# Altium PCB PCB.PcbDoc (part 1 of 2)
Units mm, origin at the board's own origin, x right, y up, seen from the top; angles counter-clockwise.
Board outline 239.14 x 129.03 mm, 3 copper layers (Top Layer, Mid-Layer 1, Bottom Layer); 117 components, 73 nets, 374 pads, 650 vias.
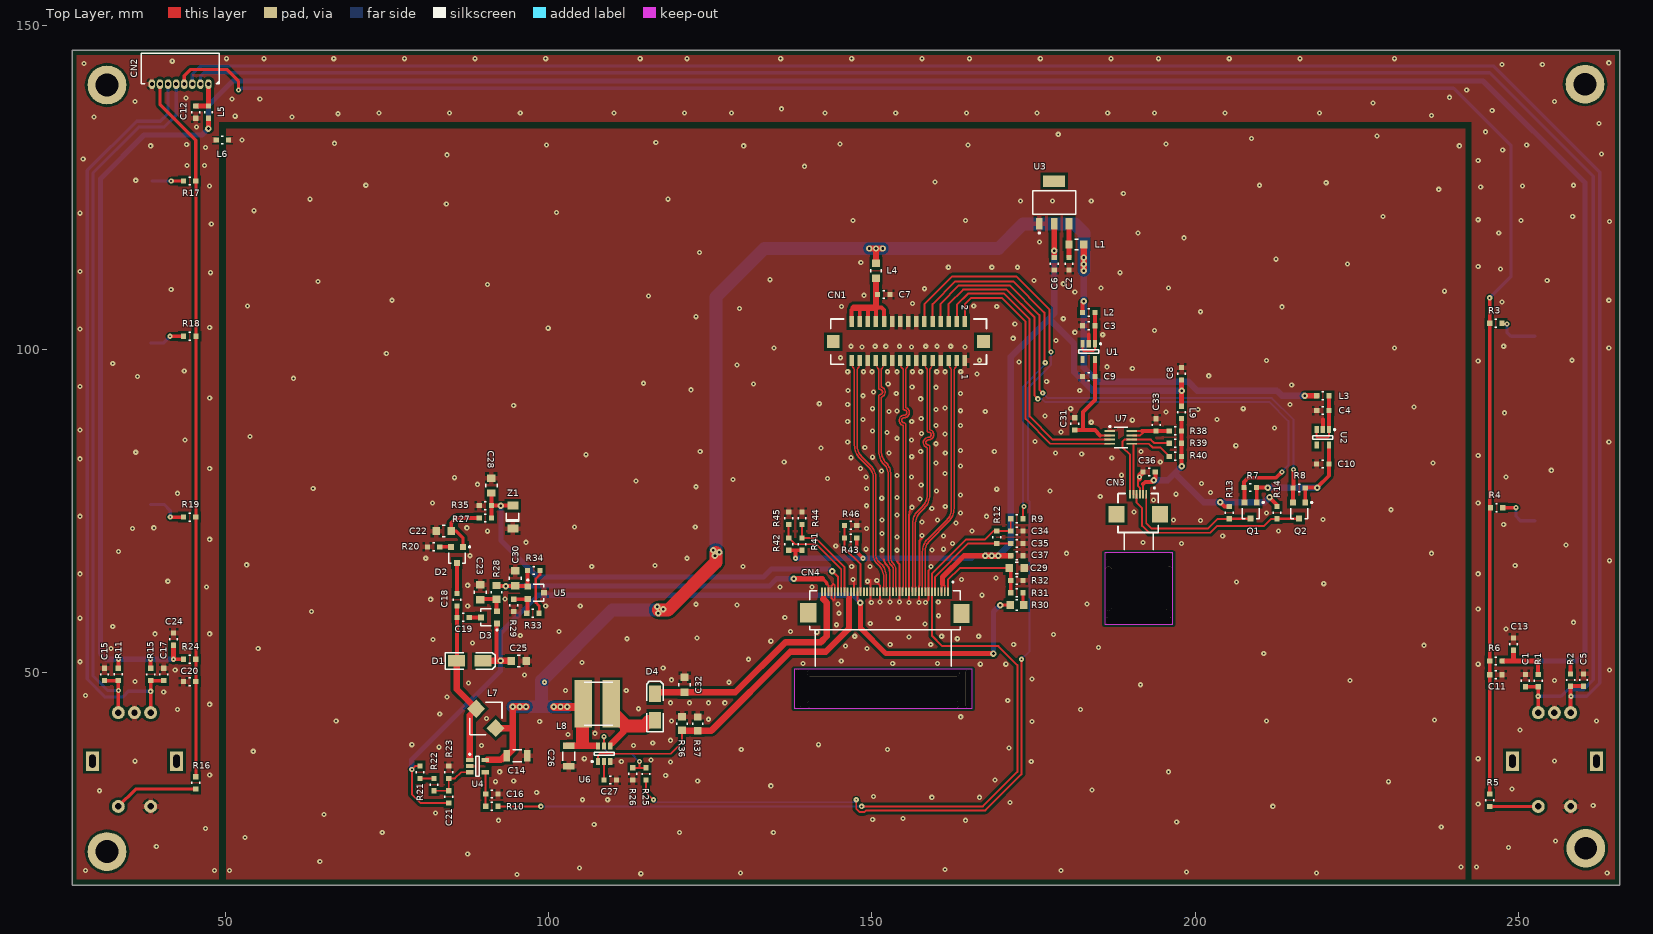
[diagram p0: Top Layer view]
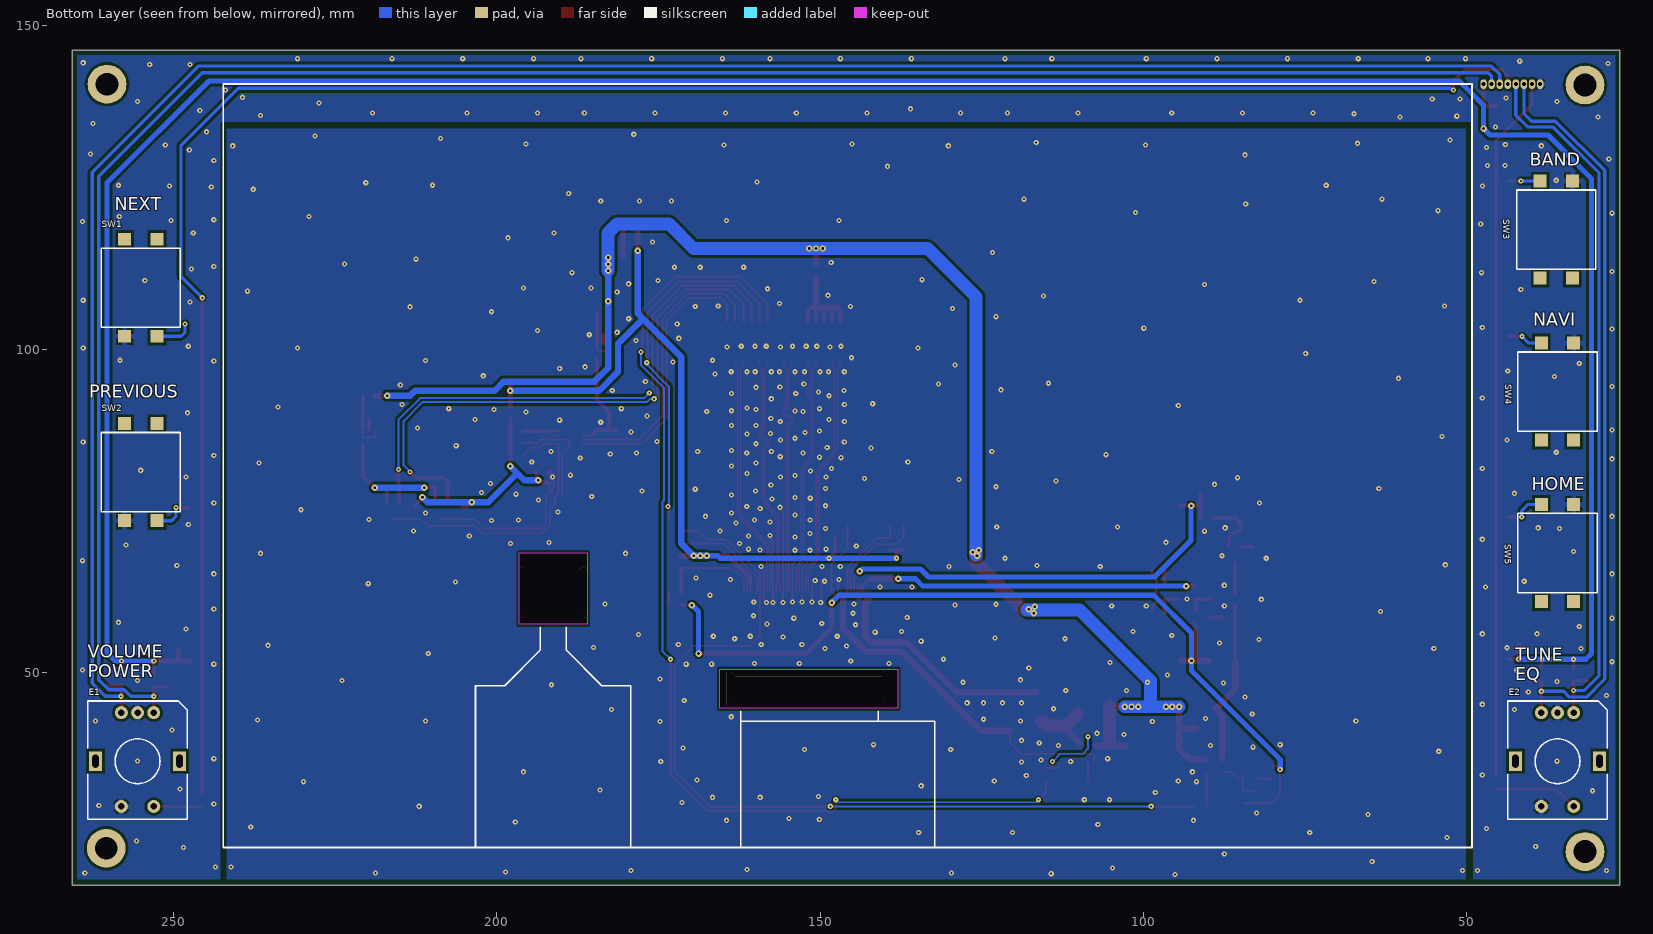
[diagram p1: Bottom Layer view, seen from below]
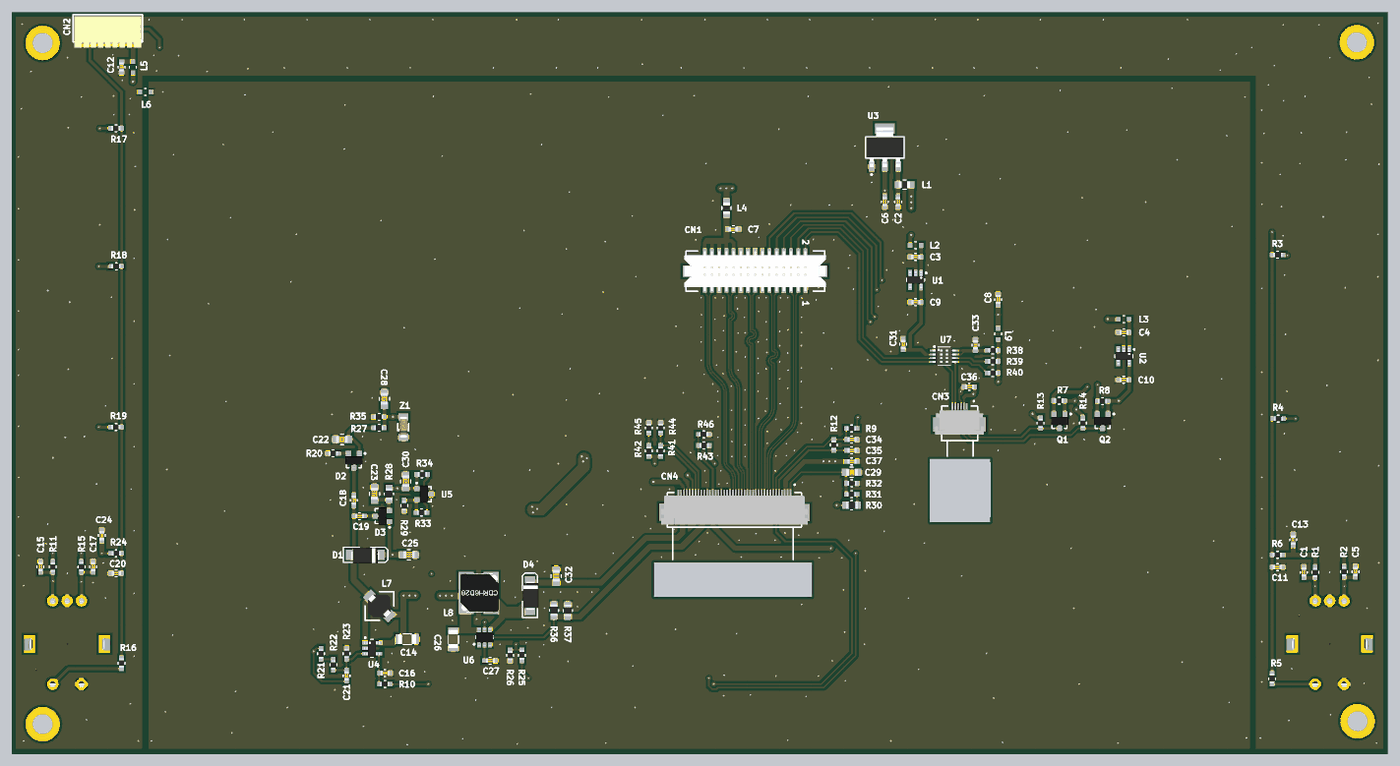
[diagram p3: 3D render of the assembled board from above, using the file's embedded part models]
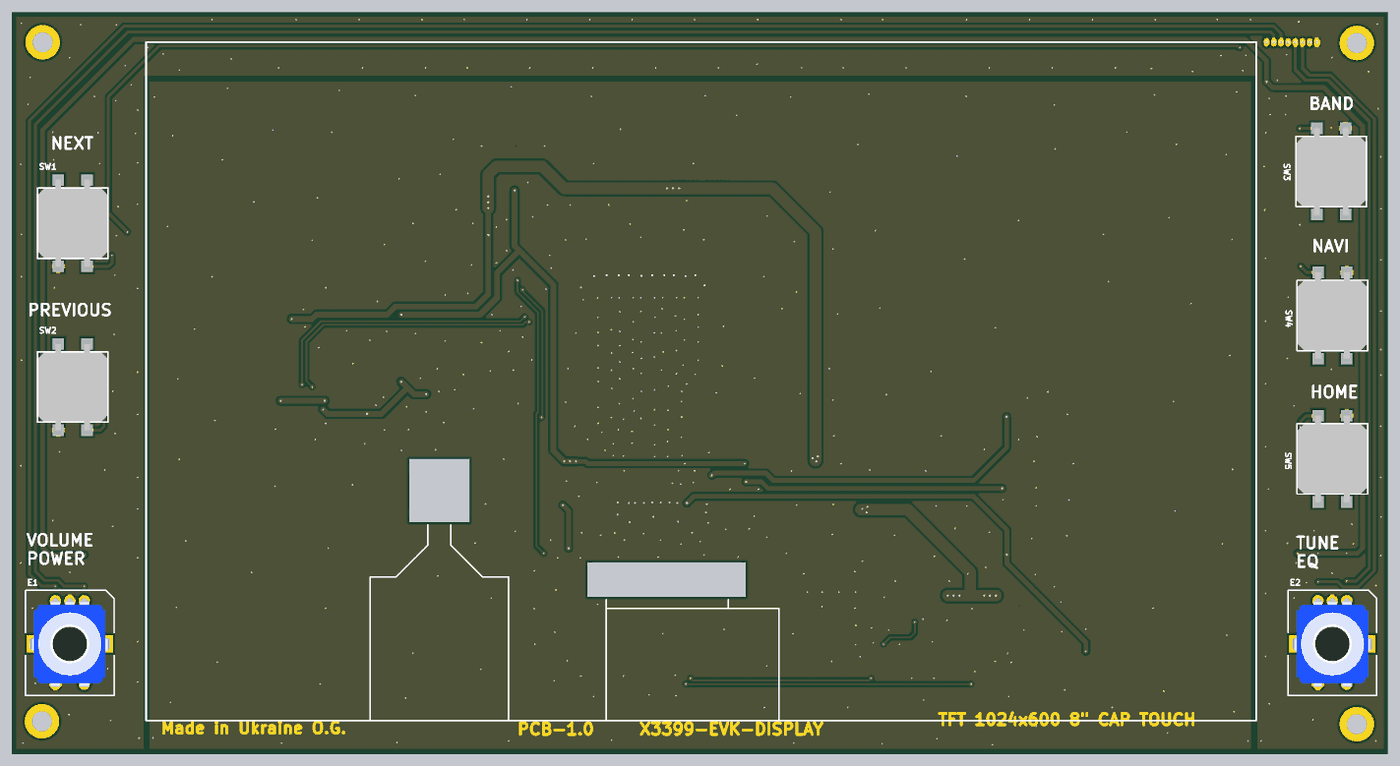
[diagram p4: 3D render of the assembled board from below, using the file's embedded part models]

## Layer stack, top to bottom
Top Solder: solder mask 0.0102, Solder Resist, Dk 3.5
Top Layer: signal copper 0.0356
Dielectric 1: dielectric 0.32, FR-4, Dk 4.8
Mid-Layer 1: signal copper 0.0356
Dielectric2: dielectric 0.32, FR-4, Dk 4.8
Bottom Layer: signal copper 0.0356
Bottom Solder: solder mask 0.0102, Solder Resist, Dk 3.5

## Board outline
26.416,146.177 26.416,17.145 265.557,17.145 265.557,146.177
cut-out: 196.5,68.5 186,68.5 186,57.5 196.5,57.5
cut-out: 165.5,50.5 138,50.5 138,44.5 165.5,44.5

## Design rules (kind name [scope] priority, off if disabled: settings)
Clearance [All] p1: gap=0.2 ignorepadtopadclearanceinfootprint=FALSE except(0.4: Arc-Fill Arc-Poly Arc-Region Track-Fill Track-Poly Track-Region SMDPad-Fill SMDPad-Poly SMDPad-Region THPad-Fill THPad-Poly THPad-Region Fill-Fill Fill-Poly Fill-Region Poly-Poly Poly-Region Region-Region)
DiffPairsRouting [All] p1: maxlimit=0.254 minlimit=0.2 mostfreqgap=0.254 toplayer_maxgap=0.2 toplayer_prefgap=0.2 toplayer_minwidth=0.2 toplayer_maxwidth=0.2 toplayer_prefwidth=0.2 midlayer1_mingap=0.254 midlayer1_minwidth=0.381 midlayer1_maxwidth=0.381 midlayer1_prefwidth=0.381 bottomlayer_maxgap=0.2 bottomlayer_prefgap=0.2 bottomlayer_minwidth=0.2 bottomlayer_maxwidth=0.2 bottomlayer_prefwidth=0.2 maxuncoupledlength=12.7
PlaneConnect [All] p1: pad.planeconnectstyle=Relief pad.reliefexpansion=0.6 pad.reliefentries=4 pad.reliefconductorwidth=0.8 pad.reliefairgap=0.3 via.planeconnectstyle=Direct via.reliefexpansion=0.508 via.reliefentries=4 via.reliefconductorwidth=0.254 via.reliefairgap=0.254
PolygonConnect [All] p1: thpad.connectstyle=Relief thpad.reliefconductorwidth=0.8 thpad.reliefentries=4 thpad.polygonreliefangle="90 Angle" thpad.airgapwidth=0.3 smdpad.connectstyle=Relief smdpad.reliefconductorwidth=0.8 smdpad.reliefentries=4 smdpad.polygonreliefangle="90 Angle" smdpad.airgapwidth=0.3 via.connectstyle=Direct via.reliefconductorwidth=0.254 via.reliefentries=4 via.polygonreliefangle="90 Angle" via.airgapwidth=0.254
RoomDefinition display [InComponentClass('display')] p1 off: confinementstyle=ConfineIn formatcopy=TRUE lockcomponents=FALSE outline 266.499,14.5 424,14.5 424,43.5 266.499,43.5
RoutingVias [All] p1: holewidth=0.3 width=0.8 viastyle="Through Hole" minholewidth=0.3 minwidth=0.8 maxholewidth=0.6 maxwidth=1
SolderMaskExpansion [All] p1: expansion=0.102
Width [All] p1: maxlimit=3 minlimit=0.2 preferedwidth=0.3 midlayer1_minwidth=0.254 midlayer1_maxwidth=0.254 midlayer1_prefwidth=0.254 minimp=50.000000 maximp=50.000000 favimp=50.000000
28 further rules are at their usual default settings.

## Classes and differential pairs
differential pair LVDS_CLK: +LVDS_CLK_P -LVDS_CLK_N
differential pair LVDS_CH3: +LVDS_CH3_P -LVDS_CH3_N
differential pair LVDS_CH2: +LVDS_CH2_P -LVDS_CH2_N
differential pair LVDS_CH1: +LVDS_CH1_P -LVDS_CH1_N
differential pair LVDS_CH0: +LVDS_CH0_P -LVDS_CH0_N

## Components (designator, comment, footprint, x,y, rotation, side; value= is the part's Value field where it differs from the comment)
C1 "CL10B103KB8NNNC" C0603 251,47.818 r90 top value=0.01uF
C2 "CC0603MRX5R5BB106" C0603 180.467,112.268 r90 top value="10uF 6.3V"
C3 "CC0603MRX5R5BB106" C0603 182.56,103.632 r0 top value="10uF 6.3V"
C4 "CC0603MRX5R5BB106" C0603 218.746,90.52 r0 top value="10uF 6.3V"
C5 "CL10B103KB8NNNC" C0603 260,47.913 r90 top value=0.01uF
C6 "CC0603MRX5R5BB106" C0603 178.167,112.268 r90 top value="10uF 6.3V"
C7 "CC0603MRX5R5BB106" C0603 152.781,108.458 r180 top value="10uF 6.3V"
C8 "C1608X7R1H104K080AA" C0603 197.866,95.25 r90 top value=0.1uF
C9 "CC0603MRX5R5BB106" C0603 182.565,95.758 r0 top value="10uF 6.3V"
C10 "CC0603MRX5R5BB106" C0603 218.741,82.265 r0 top value="10uF 6.3V"
C11 "C1608X7R1H104K080AA" C0603 247.396,49.669 r180 top value=0.1uF
C12 "CC0603MRX5R5BB106" C0603 45.466,135.696 r90 top value="10uF 6.3V"
C13 "C1608X7R1H104K080AA" C0603 249.174,55.372 r270 top value=0.1uF
C14 "CL31A107MQHNNNE" C1206 93.553,37.15 r0 top value="100uF 6.3v"
C15 "CL10B103KB8NNNC" C0603 31.369,48.768 r90 top value=0.01uF
C16 "GRM188R71E105KA12D" C0603 90.297,31.242 r0 top value=1uF
C17 "CL10B103KB8NNNC" C0603 40.513,48.768 r90 top value=0.01uF
C18 "GRM188R71E474KA12D" C0603 85.852,60.325 r90 top value="0.47uF 25v"
C19 "GRM188R71E474KA12D" C0603 85.852,58.547 r0 top value="0.47uF 25v"
C20 "C1608X7R1H104K080AA" C0603 43.561,48.614 r0 top value=0.1uF
C21 "CL10C220JB8NNNC" C0603 84.582,31.75 r270 top value=22pF
C22 "GRM188R71E105KA12D" C0805 84.763,71.882 r180 top value="1uF 25v"
C23 "GRM188R71E105KA12D" C0805 89.45,61.468 r90 top value="1uF 25v"
C24 "C1608X7R1H104K080AA" C0603 42.037,56.134 r270 top value=0.1uF
C25 "CL21A226MAQNNNE" C0805 94.46,51.816 r0 top value="22uF 25v"
C26 "CL31A107MQHNNNE" C1206 103.124,38.688 r270 top value="100uF 6.3v"
C27 "CC0603ZRY5V8BB224" C0603 108.585,33.401 r0 top value=0.22uF
C28 "GRM188R71E105KA12D" C0805 91.165,77.978 r90 top value="1uF 25v"
C29 "GRM188R71E105KA12D" C0805 171.45,66.167 r0 top value=1uF
C30 "GRM188R71E105KA12D" C0805 94.869,63.627 r90 top value="1uF 25v"
C31 "C1608X7R1H104K080AA" C0603 181.356,89.408 r270 top value=0.1uF
C32 "CL21A226MAQNNNE" C0805 121.031,47.176 r90 top value="22uF 25v"
C33 "C1608X7R1H104K080AA" C0603 193.929,87.335 r90 top value=0.1uF
C34 "CL10B103KB8NNNC" C0603 171.45,71.882 r0 top value=0.01uF
C35 "C1608X7R1H104K080AA" C0603 171.45,69.977 r0 top value=0.1uF
C36 "CC0603MRX5R5BB106" C0603 191.897,81.026 r0 top value="10uF 6.3V"
C37 "CC0603MRX5R5BB106" C0603 171.45,68.072 r0 top value="10uF 6.3V"
CN1 "LVDS" DF13EA-30DP-1.25V 155.615,101.167 r180 top locked
CN2 "KEYS" 1.25-8AW 43.088,140.97 r180 top locked
CN3 "Touch panel" 6S-0.5SH 191.15,77.55 r0 top locked
CN4 "FH12-40" 40S-0.5SH 152,62.5 r0 top locked value=ZJ080NA-08A
D1 "SS14" SMA 87.827,51.816 r0 top
D2 "BAV99.215" SOT-23-3 85.852,68.199 r180 top value=BAV99
D3 "BAV99.215" SOT-23-3 90.805,58.547 r90 top value=BAV99
D4 "SS24" SMA 116.459,44.704 r90 top value=SS14
E1 "VOLUME/POWER" "Rotary Encoder" 255.5,36.318 r0 bottom locked
E2 "TUNE/EQ" "Rotary Encoder" 36,36.318 r0 bottom locked
L1 "BLM21PG221SN1D" IND0805 180.653,116.205 r0 top value=EMIF
L2 "BLM18AG102SN1D" IND0603 184.465,105.664 r180 top value=EMIF
L3 "BLM18AG102SN1D" IND0603 220.651,92.806 r180 top value=EMIF
L4 "BLM21PG221SN1D" IND0805 150.622,111.184 r90 top value=EMIF
L5 "BLM18AG102SN1D" IND0603 47.438,137.601 r270 top value=EMIF
L6 "BLM18AG102SN1D" IND0603 50.546,132.334 r180 top value=EMIF
L7 "CDRH3D16NP-100NC" CDRH3D16 90.316,42.926 r180 top value=10uH
L8 "CDRH6D28-100NC" CDRH6D28 107.696,45.196 r0 top value=10uH
L9 "BLM18AG102SN1D" IND0603 197.866,91.186 r270 top value=EMIF
Q1 "IRLML2402TRPBF" SOT-23-3 208.534,75.057 r180 top value=IRLML2402
Q2 "IRLML2402TRPBF" SOT-23-3 216.027,75.057 r180 top value=IRLML2402
R1 "10k" R0603 253,49.723 r270 top
R2 "10k" R0603 258,47.913 r90 top
R3 "10k" R0603 245.5,104 r0 top
R4 "4.7k" R0603 245.595,75.5 r0 top
R5 "20k" R0603 245.5,29.318 r90 top
R6 "10k" R0603 247.396,51.816 r180 top
R7 "4.7k" R0603 209.423,78.613 r180 top
R8 "4.7k" R0603 216.977,78.547 r180 top
R9 "100" R0603 173.355,73.787 r180 top
R10 "47k" R0603 92.202,29.337 r180 top
R11 "10k" R0603 33.5,50.673 r270 top
R12 "47k" R0603 169.291,71.882 r270 top
R13 "4.7k" R0603 205.232,75.692 r270 top
R14 "4.7k" R0603 212.598,75.692 r270 top
R15 "10k" R0603 38.5,48.768 r90 top
R16 "20k" R0603 45.466,32.004 r90 top
R17 "15k" R0603 45.466,125.991 r180 top
R18 "10k" R0603 45.5,102 r180 top
R19 "4.7k" R0603 45.466,74.041 r180 top
R20 "100" R0603 81.28,69.449 r0 top
R21 "120k" R0603 80.137,35.56 r270 top value="120k 1%"
R22 "0" R0603 82.296,33.655 r270 top
R23 "15k" R0603 84.582,33.655 r90 top value="15k 1%"
R24 "10k" R0603 43.561,52.07 r0 top
R25 "100" R0603 115.062,33.387 r90 top
R26 "47k" R0603 113.03,35.292 r270 top
R27 "2k" R0603 91.186,73.914 r180 top
R28 "330" R0805 91.948,63.373 r270 top
R29 "11.5k" R0603 94.615,61.341 r270 top value="11.5k 1%"
R30 "16.9k" R0805 171.45,60.452 r0 top value="16.9k 1%"
R31 "2k" R0603 173.355,62.357 r180 top value="2k 1%"
R32 "10k" R0603 171.45,64.262 r0 top value="10k 1%"
R33 "0" R0603 96.647,59.182 r0 top
R34 "80.6k" R0603 96.774,65.786 r0 top value="80.6k 1%"
R35 "470k" R0603 91.186,75.819 r180 top
R36 "0.56" R0805 120.65,41.18 r90 top
R37 "DNI" R0805 123.063,41.148 r90 top
R38 "200k" R0603 195.961,87.376 r0 top
R39 "4.7k" R0603 195.961,85.471 r0 top
R40 "4.7k" R0603 195.961,83.439 r0 top
R41 "0" R0603 139.192,70.828 r270 top
R42 "DNI" R0603 137.13,70.828 r270 top value=NI
R43 "DNI" R0603 145.75,70.828 r0 top value=NI
R44 "DNI" R0603 139.192,74.828 r270 top value=NI
R45 "0" R0603 137.13,74.828 r270 top
R46 "0" R0603 147.655,72.771 r180 top
SW1 "NEXT" 12X12-SMT 255,109.5 r90 bottom value=SW-TACT-4PIN
SW2 "PREV" 12X12-SMT 255,81 r90 bottom value=SW-TACT-4PIN
SW3 "BAND" 12X12-SMT 36.195,118.491 r270 bottom locked value=SW-TACT-4PIN
SW4 "NAVI" 12X12-SMT 36,93.452 r270 bottom locked value=SW-TACT-4PIN
SW5 "HOME" 12X12-SMT 36,68.5 r270 bottom locked value=SW-TACT-4PIN
U1 "TLV75718PDBVR" SOT-23-5 183.515,99.638 r270 top value=TLV733P
U2 "TLV75730PDBVR" SOT-23-5 219.696,86.365 r270 top value=TLV733P
U3 "LM1117" SOT-223 178.167,122.68 r0 top value=LM1117-3.3
U4 "TPS61040" SOT-23-5 89.027,35.56 r0 top
U5 "LM431ACM3" SOT-23-3 98.044,62.357 r270 top
U6 "TPS61165" SOT-23-6 108.585,37.465 r0 top value=TPS61165DRV
U7 "PCA9306DCTR" PSOP-8 188.468,86.36 r0 top
Z1 "BZV55-C6V8" SOD-80C 94.488,74.041 r270 top value=6V8

## Footprints (in the part's own frame and the unit in brackets; to place one, negate y for a bottom-side part, rotate by r counter-clockwise, add the part's x,y. Pads: shape width x height; smd on the part's side, far side on the other; paste and mask are expansions set on the pad)
1.25-8AW [mm] "Connector; 8 Positions; Right Angle"
  oval 1x1.5 hole 0.6: 1(-4.35,0) 2(-3.1,0) 3(-1.85,0) 4(-0.6,0) 5(0.65,0) 6(1.9,0) 7(3.15,0) 8(4.4,0)
  silkscreen extent -6.02,-4.8 6.05,-0.07, body extent -5.83,-4.5 5.83,0.9, height 3.68
6S-0.5SH [mm]
  rect 0.3x1.3 smd: 1(1.25,0) 2(0.75,0) 3(0.25,0) 4(-0.25,0) 5(-0.75,0) 6(-1.25,0)
  rect 2.5x2.5 smd: ""(-3.35,-3.05) ""(3.35,-3.05)
  silkscreen extent -3.12,-5.87 3.12,1.1, body extent -4.25,-4.8 4.25,0.1, height 1.9
12X12-SMT [mm]
  rect 2x2 smd: 1(-7.5,2.5) 2(7.5,2.5) 3(-7.5,-2.5) 4(7.5,-2.5)
  silkscreen extent -6.12,-6.13 6.13,6.12, body extent -7.5,-6 7.5,6, height 4.3
40S-0.5SH [mm]
  rect 0.3x1.3 smd: 1(9.75,0) 2(9.25,0) 3(8.75,0) 4(8.25,0) 5(7.75,0) 6(7.25,0) 7(6.75,0) 8(6.25,0) 9(5.75,0) 10(5.25,0) 11(4.75,0) 12(4.25,0) 13(3.75,0) 14(3.25,0) 15(2.75,0) 16(2.25,0) 17(1.75,0) 18(1.25,0) 19(0.75,0) 20(0.25,0) 21(-0.25,0) 22(-0.75,0) 23(-1.25,0) 24(-1.75,0) 25(-2.25,0) 26(-2.75,0) 27(-3.25,0) 28(-3.75,0) 29(-4.25,0) 30(-4.75,0) 31(-5.25,0) 32(-5.75,0) 33(-6.25,0) 34(-6.75,0) 35(-7.25,0) 36(-7.75,0) 37(-8.25,0) 38(-8.75,0) 39(-9.25,0) 40(-9.75,0)
  rect 2.5x3 smd: ""(-11.85,-3.25) ""(11.85,-3.35)
  silkscreen extent -11.62,-5.87 11.65,1.6, body extent -12.75,-5.4 12.75,0.2, height 2
C0603 [mm]
  rect 0.8x0.8 smd: 1(1.905,0) 2(0,0)
  silkscreen extent 0.8,-0.6 1.1,0.6, body extent 0.2,-0.4 1.8,0.4, height 0.9
C0805 [mm]
  rect 1.14x1.27 smd: 1(2.1,0) 2(-0.2,0)
  silkscreen extent 0.7,-0.9 1.2,0.9, body extent 0,-0.6 2,0.6, height 0.9
C1206 [mm]
  rect 1x1.75 smd: 1(3.175,0) 2(0,0)
  silkscreen extent 0.9,-0.9 2.3,0.9, body extent -0.08,-0.85 3.75,1.25, height 1.77
CDRH3D16 [mm] "Precision Wire Wound Inductor, 2-Leads, Body 3,90x3,90mm, IPC Medium Density"
  rect 2x2 smd rot 135: 1(-1.5,1.5) 2(1.5,-1.5)
  silkscreen extent -2.5,-2.5 2.5,2.5, body extent -2.02,-2.02 2.02,2.02, height 2
CDRH6D28 [mm] "SMD Power Inductor CDRH6D28"
  rect 2.65x7.3 smd: 1(-2.325,0) 2(2,0)
  silkscreen extent -2.2,-3.35 2.2,3.35, body extent -3.35,-3.35 3.35,3.35, height 3
DF13EA-30DP-1.25V [mm] "Double Row Straight Pin Header (SMT)"
  rect 0.7x1.7 smd: 1(-8.75,2.9) 2(-8.75,-3.1) 3(-7.5,2.9) 4(-7.5,-3.1) 5(-6.25,2.9) 6(-6.25,-3.1) 7(-5,2.9) 8(-5,-3.1) 9(-3.75,2.9) 10(-3.75,-3.1) 11(-2.5,2.9) 12(-2.5,-3.1) 13(-1.25,2.9) 14(-1.25,-3.1) 15(0,2.9) 16(0,-3.1) 17(1.25,2.9) 18(1.25,-3.1) 19(2.5,2.9) 20(2.5,-3.1) 21(3.75,2.9) 22(3.75,-3.1) 23(5,2.9) 24(5,-3.1) 25(6.25,2.9) 26(6.25,-3.1) 27(7.5,2.9) 28(7.5,-3.1) 29(8.75,2.9) 30(8.75,-3.1)
  rect 2x2 smd: M1(-11.6,0) M2(11.6,0)
  silkscreen extent -12.1,-3.5 12,3.5, body extent -12.3,-3.45 12.3,3.45, height 4.8
IND0603 [mm]
  rect 0.8x0.8 smd: 1(1.905,0) 2(0,0)
  silkscreen extent 0.8,-0.6 1.1,0.6
IND0805 [mm]
  rect 1.14x1.2 smd: 1(2.1,0) 2(-0.2,0)
  silkscreen extent 0.7,-0.8 1.2,0.8, body extent -0.1,-0.6 1.9,0.6, height 0.95
PSOP-8 [mm] "PSOP, 8-Leads, Body 2,95x2,80mm, Pitch 0,65mm, IPC Medium Density"
  rect 1.6x0.3 smd: 1(-1.7,0.975) 2(-1.7,0.325) 3(-1.7,-0.325) 4(-1.7,-0.975) 5(1.7,-0.975) 6(1.7,-0.325) 7(1.7,0.325) 8(1.7,0.975)
  silkscreen extent -1.82,-1.6 1.05,1.8, body extent -2,-1.6 2,1.6, height 1.4
R0603 [mm]
  rect 0.8x0.8 smd: 1(1.905,0) 2(0,0)
  silkscreen extent 0.8,-0.6 1.1,0.6, body extent 0.2,-0.4 1.8,0.4, height 0.5
R0805 [mm]
  rect 1.14x1.2 smd: 1(2,0) 2(-0.1,0)
  silkscreen extent 0.79,-0.8 1.1,0.8, body extent 0,-0.6 2,0.6, height 0.5
"Rotary Encoder" [mm] "Rotary Encoder - SW"
  round 2 hole 1: 1(-2.5,-7.5) 2(0,-7.5) 3(2.5,-7.5) 4(2.5,7) 5(-2.5,7)
  rect 2x3 hole 1 slot 2 at 90 deg: MP1(-6.5,0) MP2(6.5,0)
  silkscreen extent -7.7,-9.3 7.7,9, body extent -7.5,-7.5 7.5,7.5, height 16.2
SMA [mm]
  rect 2.6x1.8 smd: 1(-2.05,0) 2(2.05,0)
  silkscreen extent -3.8,-1.3 3.95,1.3, body extent -2.5,-1.48 2.5,1.22, height 2.15
SOD-80C [mm]
  rect 1.25x1.7 smd: 1(-1.775,0) 2(1.775,0)
  silkscreen extent -0.6,-1 0.6,0.9, body extent -1.82,-0.8 1.88,0.8, height 1.6
SOT-23-3 [mm]
  rect 0.9x0.95 smd: 1(-0.95,-1.25) 2(0.95,-1.25) 3(0,1.25)
  silkscreen extent -2.07,-1.37 1.3,1.25, body extent -1.52,-1.29 1.48,1.25, height 1.1
SOT-23-5 [mm] "SOT23, 5-Leads, Body 2.9x1.6mm, Pitch 0.95mm, Lead Span 2.8mm, IPC Medium Density"
  rect 1.1x0.65 smd: 1(-1.2,0.95) 2(-1.2,0) 3(-1.2,-0.95) 4(1.2,-0.95) 5(1.2,0.95)
  silkscreen extent -1.32,-1.55 0.25,1.95, body extent -1.44,-1.5 1.4,1.5, height 1.1
SOT-23-6 [mm] "SOT23, 6-Leads, Body 2.9x1.6mm, Pitch 0.95mm, Lead Span 2.8mm, IPC Medium Density"
  rect 0.65x1.1 smd: 1(-0.95,-1.2) 2(0,-1.2) 3(0.95,-1.2) 4(0.95,1.2) 5(0,1.2) 6(-0.95,1.2)
  silkscreen extent -1.95,-1.32 1.55,0.25, body extent -1.55,-1.53 1.55,1.53, height 1.45
SOT-223 [mm]
  rect 1.05x1.75 smd: 1(-2.3,-3.3) 2(0,-3.3) 3(2.3,-3.3)
  rect 3.4x1.75 smd: 4(0,3.3)
  silkscreen extent -3.35,-4.85 3.35,1.85, body extent -3.25,-3.43 3.25,3.46, height 1.6

## Part data
C1 C2 C3 C4 C5 C6 C7 C8 C9 C10 C11 C12 C13 C14 C15 C16 C17 C18 C19 C20 C21 C22 C23 C24 C25 C26 C27 C28 C29 C30 C31 C32 C33 C34 C35 C36 C37: library part CAP_NPOL, "CAP_NPOL"
CN1: library part "HDR 15X2", "Header, 15-Pin, Dual row", LatestRevisionDate=17-Jul-2002, LatestRevisionNote="Re-released for DXP Platform.", Publisher="Altium Limited"
CN2: library part "HDR 8", "Header, 8-Pin", LatestRevisionDate=17-Jul-2002, LatestRevisionNote="Re-released for DXP Platform.", Publisher="Altium Limited"
CN3: library part "Header 6", "Header, 6-Pin", LatestRevisionDate=17-Jul-2002, LatestRevisionNote="Re-released for DXP Platform.", Publisher="Altium Limited"
CN4: "DT38"
D1 D4: library part SHOTTKY, "SHOTTKY"
D2 D3: library part DIODE_DUAL_1, "Dual series 1"
E1 E2: library part ENC_SW, "ENC_SW"
L1 L2 L3 L4 L5 L6 L9: library part IND_WO_IRON, "IND_WO_IRON"
L7 L8: library part IND_W_IRON, "IND_W_IRON"
Q1 Q2: library part N-Channel, "HEXFET Power MOSFET"
R1 R2 R3 R4 R5 R6 R7 R8 R10 R11 R12 R13 R14 R15 R16 R17 R18 R19 R20 R21 R22 R23 R24 R26 R27 R28 R29 R30 R31 R32 R33 R34 R35 R36 R37 R38 R39 R40 R41 R42 R43 R44 R45 R46: library part RESISTOR, "RES"
R9 R25: library part RESISTOR
SW1 SW2 SW3 SW4 SW5: library part SW-TACT-4PIN
U1 U2: library part TLV733P, "Capacitor-Free, 300-mA, Low-Dropout Regulator with Foldback Current Limit for Portable Devices"
U4: library part TPS6104x
U5: "Adjustable Precision Zener Shunt Regulator, 3-pin SOT-23", Manufacturer="National Semiconductor", PackageTopMarking=N1F*XTT, PowerWise=N, Supplier Part Number 1=1215209, ComponentLink1Description="LM431 Datasheet", ComponentLink1URL=http://www.national.com/ds/LM/LM431.pdf, ComponentLink2Description="LM431 Web Page", ComponentLink2URL=http://www.national.com/pf/LM/LM431.html, ComponentLink3Description="MF03A Package Page", ComponentLink3URL=http://www.national.com/packaging/folders/mf03a.html, CompType=MiscPower, DatasheetVersion=Mar-2005, PackageDescription="Molded SOT-23, .115 x .051 x .037in Body, 3 Lead, .075 in Pitch", PackageReference=MF03A, PackageVersion="revB, Mar-2003", PartNumber=LM431ACM3, PinCount=3, Published=4-Dec-2008, Publisher="Altium Limited", RoHS=N, Supplier 1=Farnell
U6: library part TPS61165DRV, "TPS61165DRV (WSON6 package)"
U7: library part PCA9306, "PCA9306 Dual Bidirectional I2C Bus and SMBus Voltage-Level Translator"
Z1: library part ZENNER, "ZENNER"

## Free pads (board coordinates)
  round 6 hole 3.5: MH(31.75,22.352) MH(31.75,140.843) MH(260.223,140.97)
  round 6 hole 3.5 mask+0.102: MH(260.35,22.86)
  oval 1x6 hole 1 slot 6 at 90 deg unplated: ""(138.5,47.5) ""(164.973,47.5)
  oval 23.5x1 hole 1 slot 23.5 at 0 deg unplated: ""(151.743,45.085) ""(151.75,49.911)
  oval 1x6.8 hole 1 slot 6.8 at 90 deg unplated: ""(186.563,62.992) ""(195.961,62.992)
  oval 10.5x1 hole 1 slot 10.5 at 0 deg unplated: ""(191.25,58.039) ""(191.252,67.945)

## Via types
v1: diameter 0.8, hole 0.3, Top Layer to Bottom Layer, tented both sides, 610 vias
v2: diameter 1, hole 0.4, Top Layer to Bottom Layer, tented both sides, 40 vias

## Nets (pads, with @x,y where several pads share a name; then routed paths per layer and width w, separated by ;. In a path a pad name is that pad's centre, name@x,y a point inside that pad or via, vN(x,y) a via of type N, cw(c..) or ccw(c..) an arc to the next point about the centre after c; other vN are vias at no path point)
1V8: C9.1 C31.1 U1.5 U7.2 | length 17.4
  Top Layer w0.3: 185.274,86.685 U7.2@186.768,86.685
  Top Layer w0.6: C31.1@181.356,87.503 182.626,87.503 ; U1.5@184.465,98.438 184.465,92.136 182.626,90.297 182.626,87.503 ; 185.274,86.685 184.456,87.503 182.626,87.503
3V0: C10.1 Q1.1 Q2.1 R7.2 R8.2 U2.5 | length 23.1
  Top Layer w0.3: R7.2@209.423,78.613 R7.2@209.484,78.552 ; R8.2@216.977,78.547 R8.2@217.043,78.613
  Top Layer w0.6: R7.2@209.423,78.613 v2(211.201,78.613) ; Q1.1@209.484,76.307 R7.2@209.484,78.552 ; Q2.1@216.977,76.307 R8.2@216.977,78.547 ; R8.2@217.043,78.613 v2(218.821,78.613) 220.646,80.438 C10.1@220.646,82.265 U2.5@220.646,85.165
  Bottom Layer w1: v2(211.201,78.613) v2(218.821,78.613)
3V3: C6.1 C8.2 C37.2 CN4.2 CN4.3 L9.2 R41.1 R42.1 R43.1 U3.2 | length 141.6
  Top Layer w0.3: v1@138.161,67.96 v1(138.176,67.691) ; CN4.3@160.75,62.5 160.75,63.595 160.909,63.754 161.25,63.413 CN4.2@161.25,62.5
  Top Layer w0.6: R42.1@137.13,68.923 138.161,68.923 ; v1@138.161,67.96 138.161,68.923 ; R41.1@139.192,68.923 138.161,68.923 ; R43.1@147.655,70.828 147.655,68.626 v1(148.59,67.691)
  Top Layer w0.8: 160.909,63.754 160.909,64.77 164.211,68.072 v2(167.513,68.072) ; v2(169.545,68.072) C37.2@171.45,68.072 ; C6.1@178.167,114.173 U3.2@178.167,119.38 ; L9.2@197.866,91.186 v2(197.866,93.599) C8.2@197.866,95.25
  Top Layer w1: v2(167.513,68.072) v2(168.529,68.072) v2(169.545,68.072)
  Bottom Layer w0.8: v1(138.176,67.691) v1(148.59,67.691) 165.481,67.691 165.862,68.072 v2(167.513,68.072)
  Bottom Layer w1: v2(167.513,68.072) v2(168.529,68.072) v2(169.545,68.072) 171.45,69.977 171.45,98.806 177.356,104.712 ; v2(178.181,115.189) 178.181,105.537 177.356,104.712 ; v2(197.866,93.599) 184.15,93.599 181.229,96.52 181.229,100.838 177.356,104.712
5V0: C14.2 C26.2 L1.1 L2.1 L3.1 L4.1 L7.1 L8.1 U4.5 U6.6 | length 251
  Top Layer w0.3: 94.469,41.426 94.488,41.407 ; L8.1@105.131,44.704 L8.1@105.258,44.831 ; U6.6@107.315,38.665 U6.6@107.635,38.665 ; v2@182.56,107.249 v2(182.753,107.442) ; v2(216.916,92.837) v2@216.947,92.806
  Top Layer w0.6: L2.1@182.56,105.664 v2@182.56,107.249
  Top Layer w0.8: v2@216.947,92.806 L3.1@218.746,92.806
  Top Layer w1: U4.5@90.551,36.51 92.644,36.51 C14.2@93.345,37.211 ; L7.1@91.816,41.426 94.469,41.426 ; C14.2@93.553,37.15 94.488,38.085 94.488,41.407 v2(94.488,44.729) ; C26.2@102.87,38.688 C26.2@103.124,38.688 107.292,38.688 U6.6@107.315,38.665 ; v2@149.579,115.57 v2(150.622,115.57) ; L4.1@150.622,113.284 v2(150.622,115.57) ; v2(151.638,115.57) v2(150.622,115.57) ; v2(182.753,112.141) v2(182.753,113.157) v2(182.753,114.173) L1.1@182.753,116.205
  Top Layer w1.2: v2(94.488,44.729) v2(95.524,44.729) v2(96.52,44.729) ; v2(100.838,44.704) v2(101.854,44.704) v2(102.87,44.704) L8.1@105.131,44.704
  Top Layer w2: 105.258,39.243 L8.1@105.258,44.831 ; v2@116.967,59.69 118.491,59.69 125.857,67.056 125.857,68.58
  Bottom Layer w0.3: v2@100.813,44.729 v2(100.838,44.704)
  Bottom Layer w1: v2(182.753,112.141) v2(182.753,107.442) 182.753,97.155 184.912,94.996 198.882,94.996 200.279,93.599 212.598,93.599 213.36,92.837 v2(216.916,92.837)
  Bottom Layer w2: v2(94.488,44.729) v2(95.524,44.729) v2(96.52,44.729) 98.933,44.729 ; v2@102.845,44.729 100.813,44.729 98.933,44.729 ; v2@117.983,59.69 109.855,59.69 98.933,48.768 98.933,44.729 ; v2@125.857,68.199 125.857,68.923 125.857,108.077 133.35,115.57 v2(149.606,115.57) v2(151.638,115.57) 169.545,115.57 173.355,119.38 181.356,119.38 182.753,117.983 v2(182.753,114.173) v2(182.753,113.157) v2(182.753,112.141)
  other v1: 99.371,48.514
  other v2: 116.967,59.182 117.729,59.817 116.84,60.16 125.73,68.072 126.365,68.626 125.476,68.923
AGND: C1.1 C5.1 C11.2 C12.2 C13.2 C15.1 C17.1 C20.2 C24.2 CN2.8 E1.2 E1.4 E2.2 E2.4 L6.1 SW1.1 SW2.1 SW3.1 SW4.1 SW5.1
  other v1: 263.652,19.05 28.448,19.431 48.387,19.431 243.459,19.939 248.412,22.987 39.37,23.114 255.651,24.003 46.99,25.908 261.493,29.464 243.713,29.718 30.607,31.75 248.92,32.004 47.625,34.163 36.068,36.318 255.524,36.322 243.713,36.703 250.19,41.148 262.001,42.545 42.672,44.323 47.625,45.106 28.448,46.482 40.513,46.99 36.068,48.614 255.5,48.768 42.291,50.419 264.033,50.419 243.713,51.308 27.559,51.689 32.385,53.721 43.815,53.848 39.176,56.007 47.625,56.007 248.031,56.769 32.639,57.15 258.445,57.785 27.559,58.42 243.713,59.817 47.117,63.246 41.148,64.135 27.559,65.278 243.713,65.278 249.428,66.567 264.033,67.31 33.528,68.707 257.302,69.723 47.625,70.612 35.687,72.263 38.989,72.39 247.65,72.898 27.559,74.168 243.713,76.219 42.672,77.724 248.031,80.264 255.016,81.28 47.625,81.551 27.559,83.058 243.713,83.566 36.195,84.074 263.906,85.652 43.815,85.976 27.559,87.503 247.777,90.17 47.625,92.456 27.559,94.234 36.449,95.758 43.688,96.647 32.639,97.79 243.713,98.171 258.191,98.298 263.906,100.203 247.65,100.457 27.559,103.124 47.625,103.378 247.396,107.315 263.906,107.569 41.676,109.22 254.381,110.617 47.752,111.828 27.559,112.014 247.142,112.395 243.713,112.776 246.888,117.983 47.879,119.38 264.033,119.761 250.317,119.888 243.713,120.015 258.318,120.523 27.559,121.031 244.094,125.095 47.606,125.222 250.571,125.222 258.445,125.349 36.195,126.111 44.142,128.397 46.813,128.397 243.713,129.159 28.067,129.413 262.763,130.175 247.5,130.81 46.99,131.191 38.5,131.445 251.206,131.572 44.069,131.634 244.856,133.604 45.593,134.366 262.382,134.874 29.718,135.89 60.325,135.89 51.562,136.017 236.474,136.144 67.437,136.398 73.787,136.525 84.709,136.525 95.631,136.525 110.109,136.525 121.031,136.525 128.27,136.525 142.748,136.525 153.67,136.525 164.592,136.525 175.514,136.525 186.436,136.525 193.675,136.525 204.597,136.525 219.202,136.525 245.872,136.906 136.017,137.16 227.457,138.049 36.068,138.303 255.524,138.303 51.054,138.684 55.372,138.684 43.942,138.811 239.268,138.938 241.935,140.081 247.396,144.023 253.619,144.018 28.194,144.145 263.906,144.272 41.839,144.526 50.23,144.907 56.007,144.907 66.802,144.907 77.724,144.907 88.646,144.907 99.568,144.907 114.173,144.907 121.412,144.907 135.89,144.907 146.865,144.907 157.734,144.907 165.1,144.907 176.022,144.907 186.944,144.907 194.31,144.907 205.232,144.907 216.154,144.907 230.759,144.907
AVDD: C13.1 C24.1 L5.1 R1.2 R2.1 R6.2 R11.2 R15.1 R24.2 | length 429.3
  Top Layer w0.3: R11.2@33.5,50.673 R11.2@33.528,50.701 ; R15.1@38.481,50.692 R15.1@38.5,50.673 ; R1.2@252.984,49.739 R1.2@253,49.723
  Top Layer w0.5: v1(42.037,52.07) R24.2@43.561,52.07
  Top Layer w0.6: R11.2@33.528,50.701 v1(33.528,52.07) ; R15.1@38.481,50.692 v1(38.481,52.07) ; R1.2@252.984,49.739 v1(252.984,51.816) ; R2.1@258,49.818 v1(258,51.816)
  Top Layer w0.8: v1(42.037,52.07) C24.1@42.037,54.229 ; v2(47.438,134.112) L5.1@47.438,135.696 ; R6.2@247.396,51.816 249.174,51.816 ; C13.1@249.174,53.467 249.174,51.816 ; v1(252.984,51.816) 249.174,51.816
  Bottom Layer w0.8: v1(42.037,52.07) v1(38.481,52.07) v1(33.528,52.07) 31.623,52.07 30.734,52.959 30.734,126.365 37.465,133.096 46.422,133.096 v2(47.438,134.112) 47.438,137.735 47.498,137.795 51.181,141.478 244.475,141.478 260.223,125.73 260.223,56.007 260.223,53.086 258.953,51.816 v1(258,51.816) v1(252.984,51.816)
ENC_TUNE_A: C15.2 CN2.5 E2.1 R11.1 | length 111
  Top Layer w0.5: C15.2@31.369,48.768 R11.1@33.5,48.768 E2.1@33.5,43.818
  Bottom Layer w0.5: v1(33.528,47.244) 31.877,47.244 29.591,49.53 29.591,127.254 36.703,134.366 40.64,134.366 42.438,136.164 CN2.5@42.438,140.97
ENC_TUNE_B: C17.2 CN2.6 E2.3 R15.2 | length 117.6
  Top Layer w0.5: E2.3@38.5,43.818 v1(38.5,47.117) R15.2@38.5,48.768 C17.2@40.513,48.768
  Bottom Layer w0.5: v1(38.5,47.117) 35.052,47.117 34.163,46.228 31.496,46.228 28.702,49.022 28.702,127.635 36.322,135.255 40.005,135.255 41.188,136.438 CN2.6@41.188,140.97
ENC_VOL_A: C1.2 CN2.2 E1.1 R1.1 | length 316.9
  Top Layer w0.6: C1.2@251,47.818 R1.1@253,47.818 E1.1@253,43.818
  Bottom Layer w0.5: CN2.2@46.188,140.97 46.188,142.2 46.736,142.748 245.491,142.748 261.493,126.746 261.493,49.53 ; v1(252.984,46.355) 256.521,46.355 257.537,47.371 259.969,47.371 261.493,48.895 261.493,49.657
ENC_VOL_B: C5.2 CN2.3 E1.3 R2.2 | length 316.8
  Top Layer w0.6: E1.3@258,43.818 R2.2@258,47.913 C5.2@260,47.913
  Bottom Layer w0.5: CN2.3@44.938,140.97 44.938,142.474 46.228,143.764 246.126,143.764 262.509,127.381 262.509,48.387 260.477,46.355 v1(258.064,46.355)